# Altium PCB Smart_Lock.PcbDoc
Units mil, origin at the board's own origin, x right, y up, seen from the top; angles counter-clockwise.
Board outline 3325 x 2655 mil, 2 copper layers (Top Layer, Bottom Layer); 78 components, 72 nets, 291 pads, 51 vias.
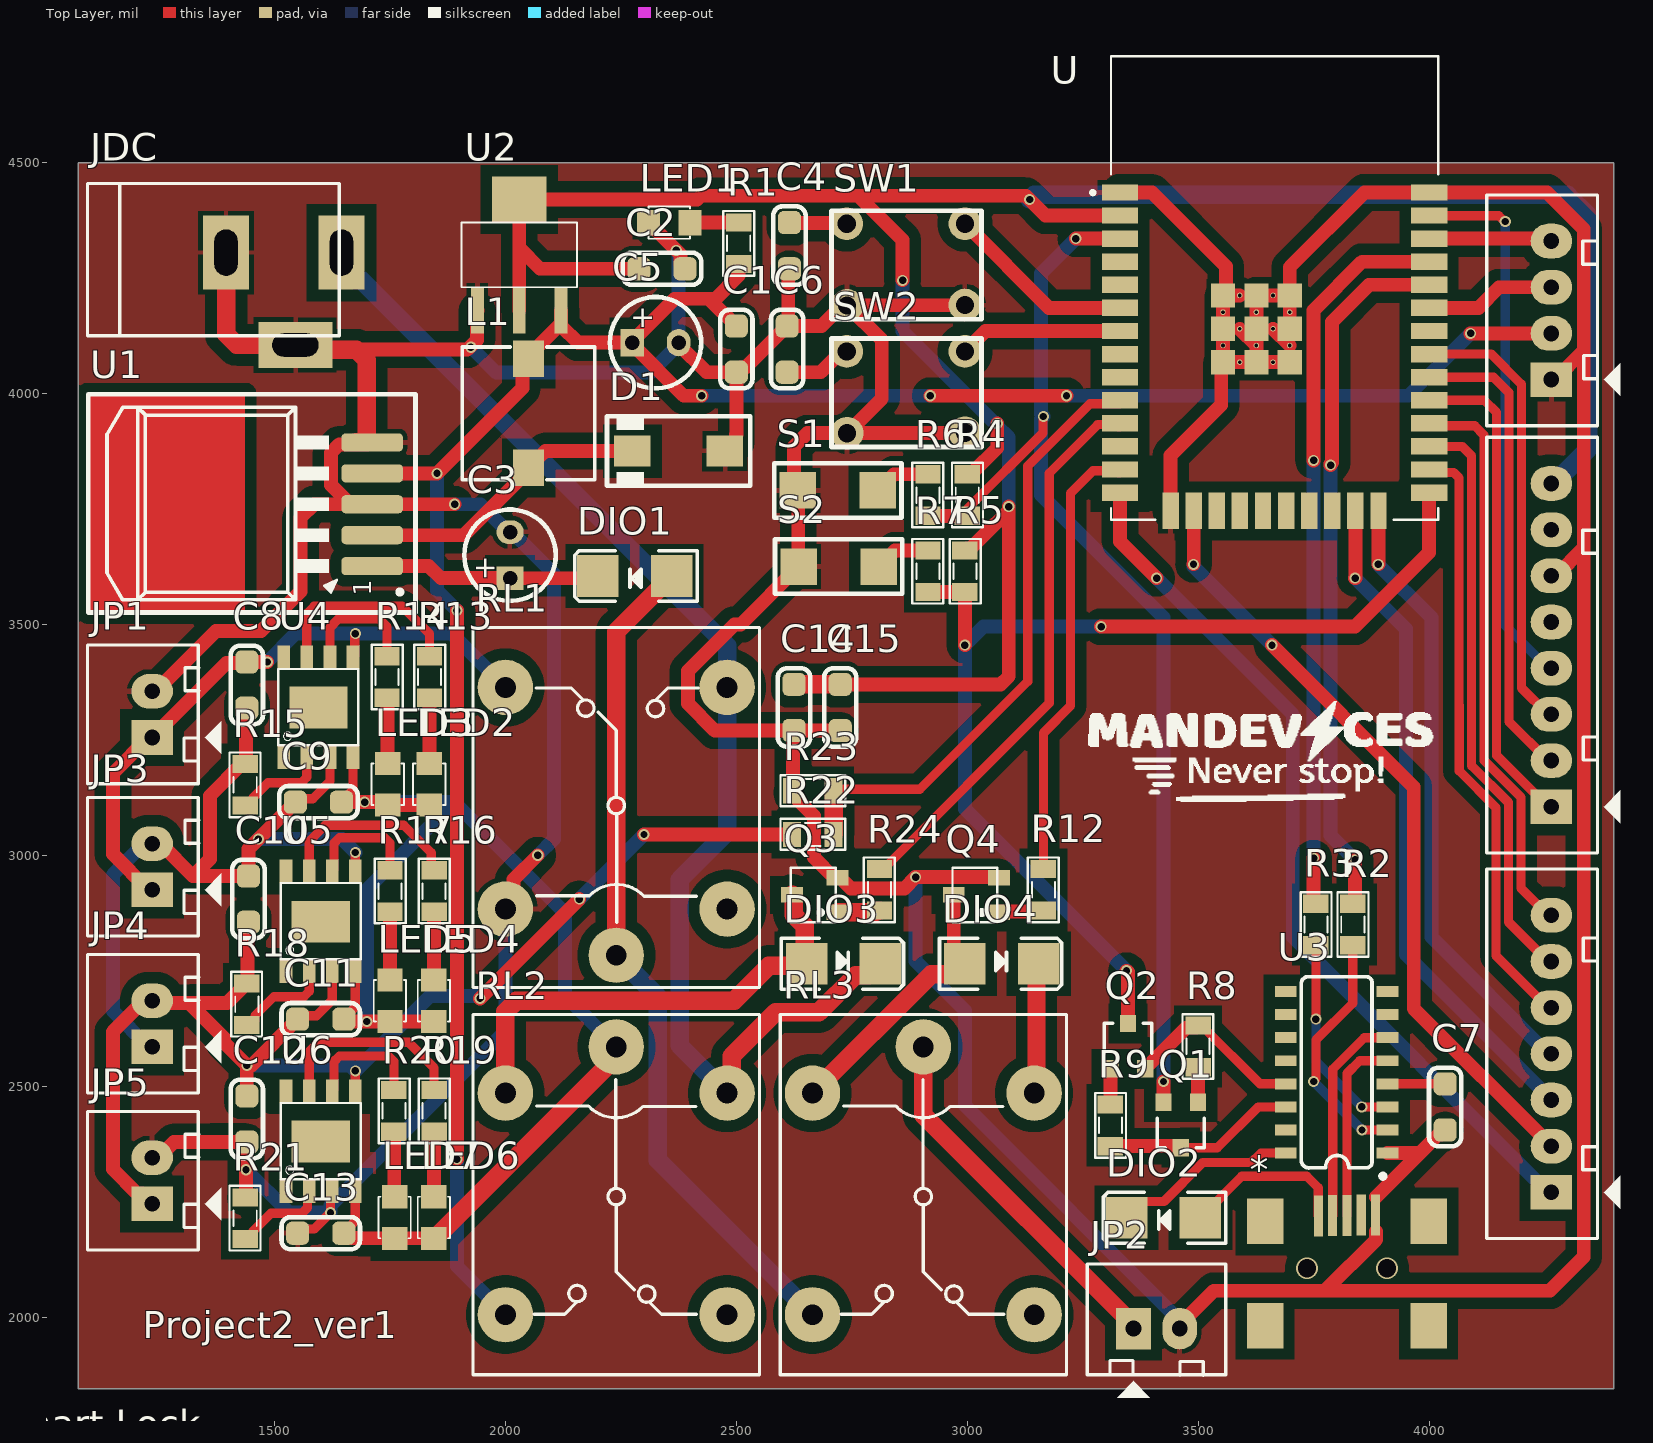
[diagram p0: Top Layer view]
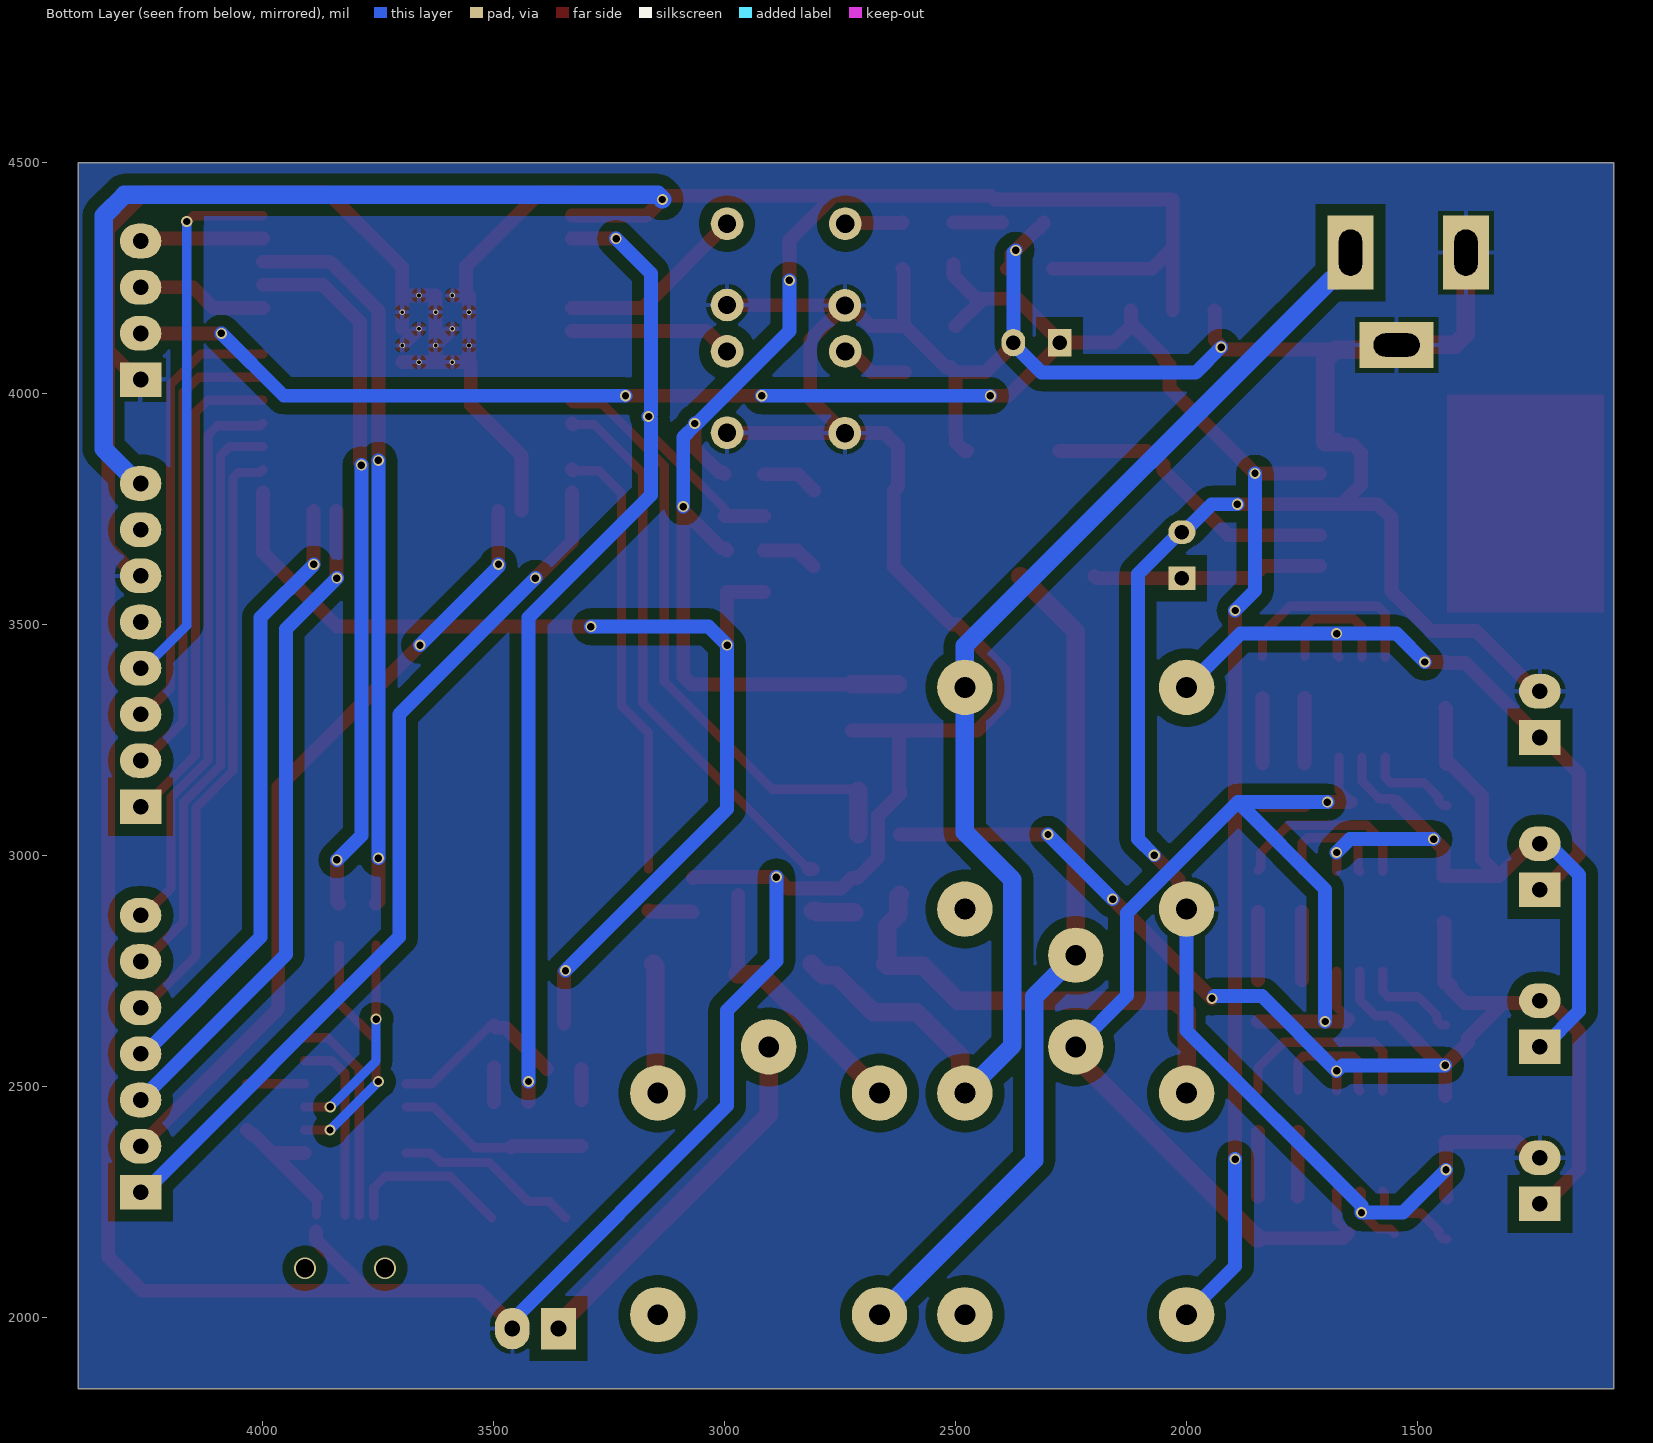
[diagram p1: Bottom Layer view, seen from below]
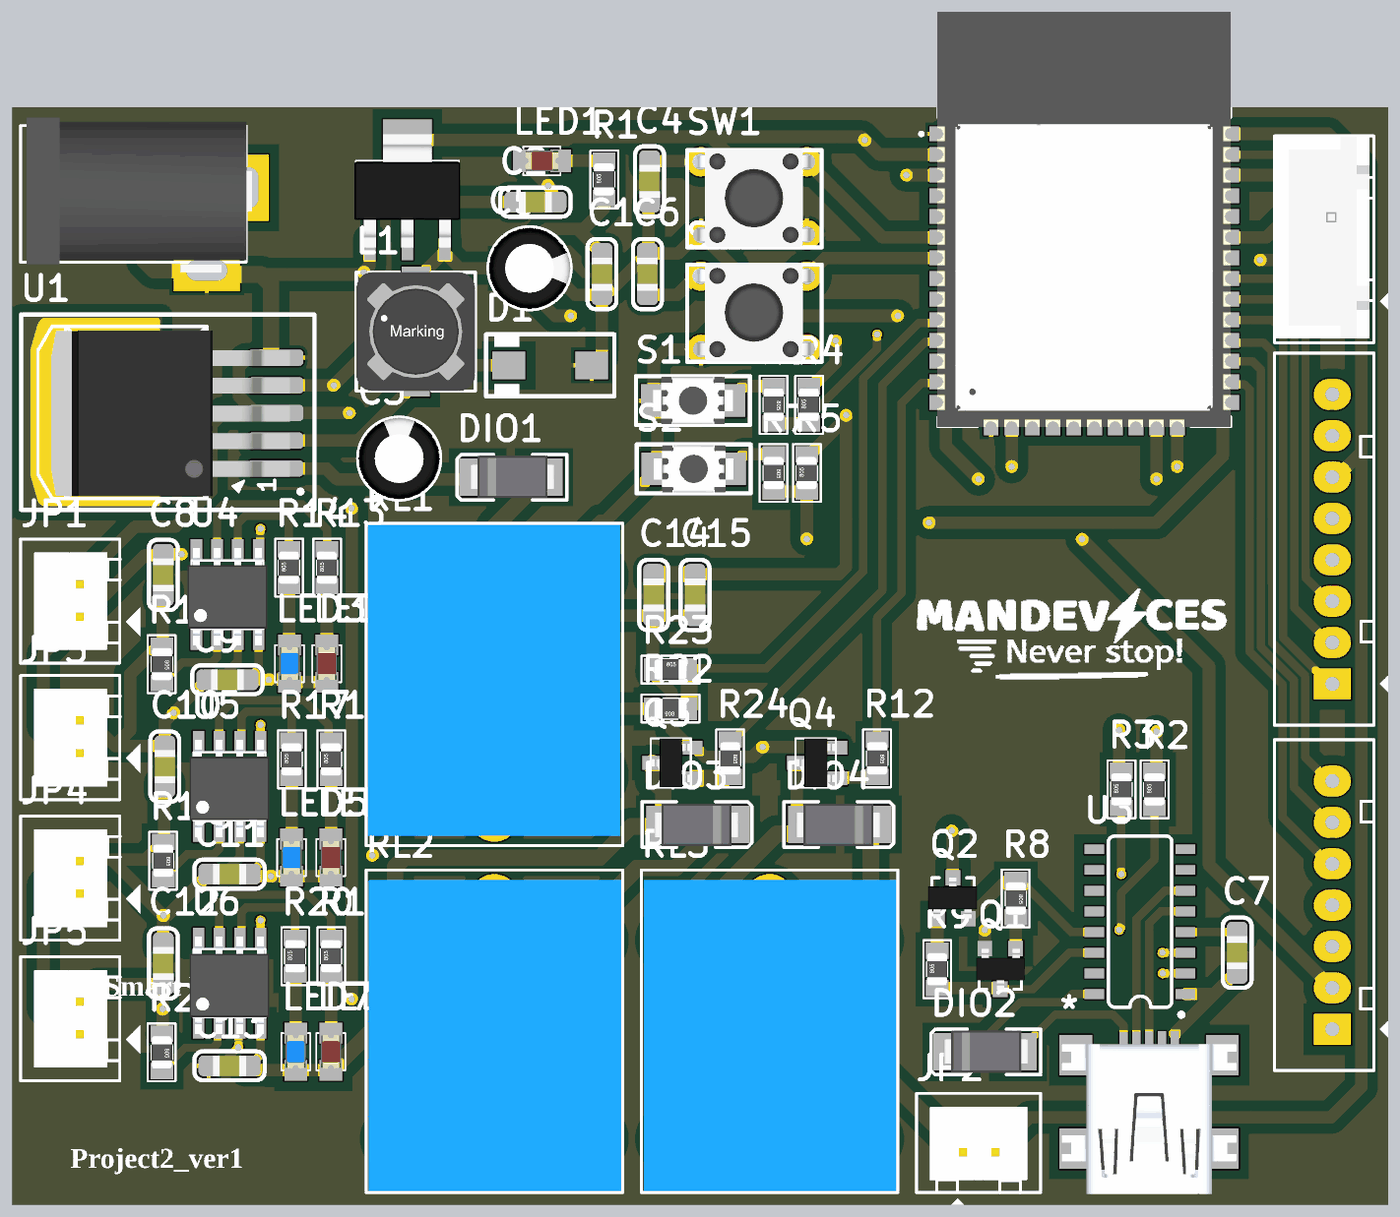
[diagram p2: 3D render of the assembled board from above, using the file's embedded part models]

## Layer stack, top to bottom
Top Solder: solder mask 0.4, Solder Resist, Dk 3.5
Top Layer: signal copper 1.4
Dielectric 1: dielectric 12.6, FR-4, Dk 4.8
Bottom Layer: signal copper 1.4
Bottom Solder: solder mask 0.4, Solder Resist, Dk 3.5

## Board outline
1075,1845 4400,1845 4400,4500 1075,4500

## Design rules (kind name [scope] priority, off if disabled: settings)
Clearance [All] p1: gap=25 ignorepadtopadclearanceinfootprint=FALSE except(0: Arc-Text Arc-Hole Track-Text Track-Hole SMDPad-Text SMDPad-Hole THPad-Text THPad-Hole Via-Text Via-Hole Fill-Text Fill-Hole Poly-Text Poly-Hole Region-Text Region-Hole Text-Text Text-Hole; 7: Arc-Arc Arc-Track Arc-SMDPad Track-Track Track-SMDPad SMDPad-SMDPad; 10: Arc-THPad Arc-Via Track-THPad Track-Via SMDPad-THPad SMDPad-Via THPad-THPad THPad-Via Via-Via)
PolygonConnect [All] p1: connectstyle=Relief reliefconductorwidth=10 reliefentries=4 polygonreliefangle="90 Angle" airgapwidth=10
RoutingVias [All] p1: holewidth=28 width=50 viastyle="Through Hole" minholewidth=28 minwidth=50 maxholewidth=28 maxwidth=50
SolderMaskExpansion [All] p1: expansion=4 istentingtop=FALSE
Width [All] p1: maxlimit=40 minlimit=20 preferedwidth=30
30 further rules are at their usual default settings.

## Classes and differential pairs
component class Smart_Lock: * C1 C2 C3 C4 C5 C6 C7 C8 C9 C10 C11 C12 C13 C14 C15 D1 DIO1 DIO2 DIO3 DIO4 JDC JP1 JP2 JP3 JP4 JP5 L1 LED1 LED2 LED3 LED4 LED5 LED6 LED7 Q1 Q2 Q3 Q4 R1 R2 R3 R4 R5 R6 R7 R8 R9 R12 R13 R14 R15 R16 R17 R18 R19 R20 R21 R22 R23 R24 RL1 RL2 RL3 S1 S2 SW1 SW2

## Components (designator, comment, footprint, x,y, rotation, side; value= is the part's Value field where it differs from the comment)
* "USB-M" USB-B-Mini 3822.33,2207.2 r180 top
C1 "104" CAP_0805 2500,4096 r90 top value=33p
C2 "104" CAP_0805 2339,4270 r180 top value=33p
C3 "680uF" C5mm 2010,3649.78 r90 top
C4 "100nF" CAP_0805 2615,4320 r90 top value=33p
C5 "220uF" C5mm 2325,4110 r0 top
C6 "100nF" CAP_0805 2610,4096 r270 top value=33p
C7 "Capacitor Ceramic" CAP_0805 4035,2455 r90 top value=33p
C8 "10uF" CAP_0805 1440,3368.5 r90 top value=33p
C9 "10uF" CAP_0805 1595,3115 r0 top value=33p
C10 "10uF" CAP_0805 1443.5,2905 r90 top value=33p
C11 "10uF" CAP_0805 1600,2645 r0 top value=33p
C12 "10uF" CAP_0805 1440,2428.86 r90 top value=33p
C13 "10uF" CAP_0805 1600,2181.5 r0 top value=33p
C14 "100nF" CAP_0805 2625,3320 r270 top value=33p
C15 "10uF" CAP_0805 2725,3320 r270 top value=33p
D1 "Diode Zener" SMA 2375,3875.33 r180 top
DIO1 "Diode SMD" DIO-SMD-106 2280,3604.72 r0 top value=1N5007
DIO2 "Diode SMD" DIO-SMD-106 3425,2215 r0 top value=1N5007
DIO3 "Diode SMD" DIO-SMD-106 2732.1,2765 r180 top value=1N5007
DIO4 "Diode SMD" DIO-SMD-106 3075,2765 r180 top value=1N5007
JDC "Jac DC" DC-IN 1520,4204.88 r0 top
JP1 "JP2" CON2 1235,3255 r90 top value="Connector 2"
JP2 "JP2" CON2 3360,1975 r0 top value="Connector 2"
JP3 "JP2" CON2 1235,2925 r90 top value="Connector 2"
JP4 "JP2" CON2 1235,2585 r90 top value="Connector 2"
JP5 "JP2" CON2 1235,2245 r90 top value="Connector 2"
L1 "33uH" L-SMD-M-7.3x4.5 2050,3956.89 r180 top value="150 mH"
LED1 "LED" LED-0805-Red 2400,4370 r180 top value="LED 3 - 5 ly 2 Colour"
LED2 "LED" LED-0805-Red 1835,3109 r90 top value="LED 3 ly Single Colour"
LED3 "LED" LED-0805-Blue 1745,3109 r90 top value="LED 3 ly Single Colour"
LED4 "LED" LED-0805-Red 1845,2640 r90 top value="LED 3 ly Single Colour"
LED5 "LED" LED-0805-Blue 1750,2640 r90 top value="LED 3 ly Single Colour"
LED6 "LED" LED-0805-Red 1845,2170.5 r90 top value="LED 3 ly Single Colour"
LED7 "LED" LED-0805-Blue 1760,2170.5 r90 top value="LED 3 ly Single Colour"
Q1 "2N222" SOT23-231 3462.4,2415.79 r180 top value=C1815
Q2 "2N222" SOT23-231 3348.16,2586.59 r0 top value=C1815
Q3 "2N222" SOT23D 2670,2914 r90 top value=C1815
Q4 "2N222" SOT23D 3020,2914 r90 top value=C1815
R1 "R0.4W" RES-SMD-0805 2505,4325 r90 top value=1k
R2 "470" RES-SMD-0805 3835,2850 r90 top
R3 "470" RES-SMD-0805 3755,2850 r90 top
R4 "R0.4W" RES-SMD-0805 3000,3780 r90 top value=12k
R5 "R0.4W" RES-SMD-0805 2995,3615 r90 top value=12k
R6 "R0.4W" RES-SMD-0805 2915,3780 r270 top value=470
R7 "R0.4W" RES-SMD-0805 2915,3615 r270 top value=470
R8 "R0.4W" RES-SMD-0805 3500,2586 r270 top value=12k
R9 "R0.4W" RES-SMD-0805 3310,2415 r90 top value=12k
R12 "1k" RES-SMD-0805 3165,2925 r270 top
R13 "1k" RES-SMD-0805 1835.5,3386 r90 top
R14 "1k" RES-SMD-0805 1743.5,3386 r90 top
R15 "1.2k" RES-SMD-0805 1436.5,3152.5 r270 top
R16 "1k" RES-SMD-0805 1845.5,2922.5 r90 top
R17 "1k" RES-SMD-0805 1750,2922.5 r90 top
R18 "1.2k" RES-SMD-0805 1440,2677.5 r270 top
R19 "1k" RES-SMD-0805 1845.5,2446.36 r90 top
R20 "1k" RES-SMD-0805 1758.5,2446.36 r90 top
R21 "1.2k" RES-SMD-0805 1436.5,2214 r270 top
R22 "1k" RES-SMD-0805 2665.66,3045 r180 top
R23 "1k" RES-SMD-0805 2665.66,3140 r0 top
R24 "1k" RES-SMD-0805 2810,2925 r270 top
RL1 "Relay 10A/12V" "RELAY 5" 2240,3108.41 r90 top value="Relay SPDT, 10A, 12V"
RL2 "Relay 10A/12V" "RELAY 5" 2240,2260 r270 top value="Relay SPDT, 10A, 12V"
RL3 "Relay 10A/5V" "RELAY 5" 2905,2260 r270 top value="Relay SPDT, 10A, 12V"
S1 "SW-SMD" "SW 3x2x4" 2720,3790 r180 top
S2 "SW-SMD" "SW 3x2x4" 2721.61,3625 r180 top
SW1 "SW-4P-S" SW-4P-S 2995,4191.57 r180 top
SW2 "SW-4P-S" SW-4P-S 2995,3915 r180 top
U "ESP32-WROOM-32" MODULE_ESP32-WROOM-32 3665.49,4228.19 r0 top
U1 "LM2976" TO263 1476.42,3745 r90 top
U2 "LM1117-ADJ" LM1117-SOP 2030,4230 r0 top
U3 "CH340C" SO016 3800,2530 r90 top
U4 "TP4056" TP4056 1595,3320.64 r90 top
U5 "TP4056" TP4056 1600,2857.14 r90 top
U6 "TP4056" TP4056 1600,2381 r90 top
? "I2C" CON4 4265,4030 r90 top value="Connector 4"
? "Keypad" Header7 4265,2270 r90 top value="Connector 7"
? "RFID" CON8 4265,3105 r90 top value="Connector 8"

## Footprints (in the part's own frame and the unit in brackets; to place one, negate y for a bottom-side part, rotate by r counter-clockwise, add the part's x,y. Pads: shape width x height; smd on the part's side, far side on the other; paste and mask are expansions set on the pad)
C5mm [mm]
  rect 1.3x1.5 hole 0.8: 1(-1.27,0)
  oval 1.3x1.5 hole 0.8: 2(1.27,0)
  silkscreen extent -2.51,-2.51 2.51,2.51, body extent -2.5,-2.5 2.49,2.5, height 11.01
CAP_0805 [mil]
  rrect50% 50x50 smd: 1(-50,0) 2(50,0)
  silkscreen extent -85,-35 85,35, body extent -40,-25 40,25, height 24
CON2 [mil] "CON2"
  rect 75x90 hole 34: 1(0,0)
  oval 75x90 hole 34: 2(100,0)
  silkscreen extent -100,-150 200,140, body extent -68,-70 168,107, height 236
CON4 [mil] "CON4"
  rect 75x90 hole 34: 1(0,0)
  oval 75x90 hole 34: 2(100,0) 3(200,0) 4(300,0)
  silkscreen extent -100,-150 400,140, body extent -90,-90 398,136, height 276
CON8 [mil] "CON8"
  rect 75x90 hole 34: 1(0,0)
  oval 75x90 hole 34: 2(100,0) 3(200,0) 4(300,0) 5(400,0) 6(500,0) 7(600,0) 8(700,0)
  silkscreen extent -100,-150 800,140
DC-IN [mil] "Jac DC input"
  rect 100x160 hole 50 slot 100 at 90 deg: 1(125,100) 2(-125,100)
  rect 160x100 hole 50 slot 100 at 0 deg: 3(25,-100)
  silkscreen extent -425,-80 120,250, body extent -410,-105 134,269, height 434
DIO-SMD-106 [mil]
  rect 90x90.55 smd: 1(80,0) 2(-80,0)
  silkscreen extent -130,-55 135,55, body extent -99,-50 106,52, height 95
Header7 [mil] "CON7"
  rect 75x90 hole 34: 1(0,0)
  oval 75x90 hole 34: 2(100,0) 3(200,0) 4(300,0) 5(400,0) 6(500,0) 7(600,0)
  silkscreen extent -100,-150 700,140
L-SMD-M-7.3x4.5 [mm] "WE-PDA SMD Shielded Power Inductor, 7345"
  rect 1.7x2 smd: 1(0,3) 2(0,-3)
  silkscreen extent -3.65,-3.65 3.65,3.65, body extent -3.65,-3.65 3.65,3.65, height 4.05
LED-0805-Blue [mil]
  rect 50x55 smd: 1(0,0) 2(90,0)
  silkscreen extent 0,-35 90,35, body extent 5,-25 85,25, height 43
LED-0805-Red [mil]
  rect 50x55 smd: 1(0,0) 2(90,0)
  silkscreen extent 0,-35 90,35, body extent 5,-25 85,25, height 43
LM1117-SOP [mm]
  rect 0.7x2.54 smd: 1(-2.3,-1.27) 2(0,-1.27) 3(2.3,-1.27)
  rect 3x2.54 smd: 2(0,4.826)
  silkscreen extent -3.17,0 3.17,3.56, body extent -3.25,-1.78 3.25,5.18, height 1.68
MODULE_ESP32-WROOM-32 [mm]
  rect 2x0.9 smd: 1(-8.5,5.26) 2(-8.5,3.99) 3(-8.5,2.72) 4(-8.5,1.45) 5(-8.5,0.18) 6(-8.5,-1.09) 7(-8.5,-2.36) 8(-8.5,-3.63) 9(-8.5,-4.9) 10(-8.5,-6.17) 11(-8.5,-7.44) 12(-8.5,-8.71) 13(-8.5,-9.98) 14(-8.5,-11.25) 25(8.5,-11.25) 26(8.5,-9.98) 27(8.5,-8.71) 28(8.5,-7.44) 29(8.5,-6.17) 30(8.5,-4.9) 31(8.5,-3.63) 32(8.5,-2.36) 33(8.5,-1.09) 34(8.5,0.18) 35(8.5,1.45) 36(8.5,2.72) 37(8.5,3.99) 38(8.5,5.26)
  rect 0.9x2 smd: 15(-5.715,-12.25) 16(-4.445,-12.25) 17(-3.175,-12.25) 18(-1.905,-12.25) 19(-0.635,-12.25) 20(0.635,-12.25) 21(1.905,-12.25) 22(3.175,-12.25) 23(4.445,-12.25) 24(5.715,-12.25)
  rect 1.33x1.33 smd: 39_1(-2.835,-0.405) 39_2(-1,-0.405) 39_3(0.835,-0.405) 39_4(-2.835,-2.24) 39_5(-1,-2.24) 39_6(0.835,-2.24) 39_7(-2.835,-4.075) 39_8(-1,-4.075) 39_9(0.835,-4.075)
  round 0.3 hole 0.2: 39_10(-1.917,-0.405) 39_11(-0.082,-0.405) 39_12(-2.835,-1.322) 39_13(-1,-1.322) 39_14(0.835,-1.322) 39_15(-1.917,-2.24) 39_16(-0.082,-2.24) 39_17(-2.835,-3.157) 39_18(-1,-3.157) 39_19(0.835,-3.157) 39_20(-1.917,-4.075) 39_21(-0.082,-4.075)
  silkscreen extent -10.1,-12.75 9,12.75, body extent -9.02,-12.75 8.98,12.75, height 3.2
"RELAY 5" [mil] "Reley DPDT, 8 pin, 1A, W400mil, L800mil,H 300mil"
  round 120 hole 45: 1(-325,0) 2(255,240) 3(255,-240) 4(-225,-240) 5(-225,240)
  silkscreen extent -395,-310 385,310, body extent -371,-304 381,306, height 602
RES-SMD-0805 [mil]
  rect 39.37x55 smd: 1(-45,0) 2(45,0)
  silkscreen extent -70,-34 70,33, body extent -39,-25 39,25, height 31
SMA [mm]
  rect 2x1.7 smd: 1(-2.544,0) 2(2.544,0)
  silkscreen extent -3.94,-1.9 3.94,1.9, body extent -2.87,-1.4 2.87,1.4, height 2.29
SO016 [mm]
  rect 0.6x1.2 smd: 1(-4.445,-2.8) 2(-3.175,-2.8) 3(-1.905,-2.8) 4(-0.635,-2.8) 5(0.635,-2.8) 6(1.905,-2.8) 7(3.175,-2.8) 8(4.445,-2.8) 9(4.445,2.8) 10(3.175,2.8) 11(1.905,2.8) 12(0.635,2.8) 13(-0.635,2.8) 14(-1.905,2.8) 15(-3.175,2.8) 16(-4.445,2.8)
  silkscreen extent -5.84,-2.67 5.26,1.95
SOT23-231 [mm]
  rect 0.9x0.95 smd mask+0: 1(0.95,-1.25)
  rect 0.9x0.95 smd: 2(-0.95,-1.25) 3(0,1.25)
  silkscreen extent -1.3,-0.38 1.3,1.25, body extent -1.52,-1.23 1.48,1.27, height 1.06
SOT23D [mm] "SOT 23C - 1-3-2 - BCE"
  rect 0.85x1.2 smd: 1(-0.95,-1.25) 2(0.94,-1.245) 3(0,1.25)
  silkscreen extent -1.5,-1.14 1.5,1.32, body extent -1.5,-1.17 1.5,1.33, height 1.06
"SW 3x2x4" [mm]
  rect 2x2 smd: 1(-2.2,0) 2(2.2,0)
  silkscreen extent -3.5,-1.5 3.5,1.5, body extent -2.45,-1.45 2.45,1.45, height 2
SW-4P-S [mm]
  round 1.8 hole 1: 1(0,0) 2(0,-4.47) 3(6.502,-4.47) 4(6.477,0.025)
  silkscreen extent -0.91,-5.18 7.34,0.79, body extent -0.86,-5.23 7.35,0.76, height 9.52
TO263 [mm]
  rrect50% 1x3.4 smd: 1(-3.019,-5.969) 2(-1.319,-5.969) 4(2.081,-5.969) 5(3.781,-5.969)
  rrect50% 1x3.4 smd mask+0: 3(0.381,-5.969)
  Top Layer region: -5.568,1.016 6.432,1.016 6.432,9.65 -5.568,9.65
  silkscreen extent -5.57,-8.35 6.43,9.65, body extent -4.73,-6.84 5.43,7.8, height 4.57
TP4056 [mm]
  rect 1.3x0.7 smd: 1(-2.75,1.905) 2(-2.75,0.635) 3(-2.75,-0.635) 4(-2.75,-1.905) 5(2.75,-1.905) 6(2.75,-0.635) 7(2.75,0.635) 8(2.75,1.905)
  rect 2.3x3.2 smd: GND(-0.025,0)
  silkscreen extent -2.1,-2.2 2.1,2.2, body extent -3.13,-2.45 2.87,2.45, height 1.75
USB-B-Mini [mm]
  rect 2x2.5 smd: 0(-4.5,0) 0(-4.496,5.74) 0(4.5,0) 0(4.504,5.74)
  rect 0.5x2.25 smd: 1(1.575,-0.305) 2(0.787,-0.317) 3(0,-0.33) 4(-0.787,-0.343) 5(-1.575,-0.356)
  body extent -5.35,-0.67 5.35,8.53, height 3.95

## Part data
C1 C2 C4 C6 C7 C8 C9 C10 C11 C12 C13 C14 C15: library part CapSMD, "Capacitor", LatestRevisionDate=17-Jul-2002, LatestRevisionNote="Re-released for DXP Platform.", PackageReference=RAD-0.3, Published=8-Jun-2000, Publisher="Altium Limited"
C3 C5: library part "Cap Pol 5mm", "Polarized Capacitor (Axial)", LatestRevisionDate=17-Jul-2002, LatestRevisionNote="Re-released for DXP Platform.", PackageReference=POLAR0.8, Published=8-Jun-2000, Publisher="Altium Limited"
D1: "Zener Diode", LatestRevisionDate=17-Jul-2002, LatestRevisionNote="Re-released for DXP Platform.", PackageReference=DIODE-0.7, Published=8-Jun-2000, Publisher="Altium Limited"
DIO1 DIO2 DIO3 DIO4: "Default Diode", Code - JEDEC=DO-214-AB, Published=8-Jun-2000, Publisher="Altium Limited", Revision="July-2002: Re-released for DXP Platform."
JDC: library part DCIN, "Jac DC input"
JP1 JP2 JP3 JP4 JP5: library part Con2, "Connector 2"
L1: library part L1, "Inductor"
LED1: library part "LED SMD"
LED2 LED3 LED4 LED5 LED6 LED7: "LED Single colour Green and Red"
Q1 Q2 Q3 Q4: "NPN 600mW, ECB"
R1 R4 R5 R6 R7 R8 R9: library part "Res 1/4 W", "Resistor", LatestRevisionDate=17-Jul-2002, LatestRevisionNote="Re-released for DXP Platform.", PackageReference=AXIAL-0.4, Published=8-Jun-2000, Publisher="Altium Limited"
R2 R3 R12 R13 R14 R15 R16 R17 R18 R19 R20 R21 R22 R23 R24: library part "Resistor - SMD", "Resistor", Manufacturer="Generic Components", Class=Passive, Published=08/06/2000, Publisher="Altium Hobart Technology Centre"
RL1 RL2 RL3: library part "Relay 5", "Relay SPDT,10A - 12VDC 5 Pin"
S1 S2: "Switch", LatestRevisionDate=17-Jul-2002, LatestRevisionNote="Re-released for DXP Platform.", PackageReference=SPST-2, Published=24-Mar-1999, Publisher="Altium Limited"
SW1 SW2: library part SW-4PIN-SMALL, "Switch Small 4 Pin", LatestRevisionDate=17-Jul-2002, LatestRevisionNote="Re-released for DXP Platform.", PackageReference=SPST-2, Published=24-Mar-1999, Publisher="Altium Limited"
U: "Bluetooth, WiFi Transceiver Module 2.4GHz ~ 2.5GHz Surface Mount", Package="Module Espressif Systems", Digi-Key_Part_Number=1904-1010-1-ND, Digi-Key_Purchase_URL=https://www.digikey.com/product-detail/en/espressif-systems/ESP32-WROOM-32/1904-1010-1-ND/8544305?utm_source=snapeda&utm_medium=aggregator&utm_campaign=symbol, MF="Espressif Systems", MP=ESP32-WROOM-32, SnapEDA_Link=https://www.snapeda.com/parts/ESP32-WROOM-32/Espressif%20Systems/view-part/2753322/?ref=snap
U1: library part LM2596, Max Input Voltage="12 V", Max Output Current="3 (6.0 peak) A", Max Output Voltage=mV, Temperature Range="-40 to +125 degC", Category=IC-Power, Min Input Voltage=mV, Min Output Voltage=mV, Mounting Technology="Surface Mount", Status=Unreleased, Supply Voltage=mV
U2: "800mA Low-Dropout Linear Regulator", Creator="Nguyen Ba Bien", Website=http://group3i.net
U3: "USB to serial chip CH340", Package=Package, Availability=Unavailable, Check_prices=https://www.snapeda.com/parts/CH340C/WCH/view-part/5428851/?ref=eda, MF=WCH, MP=CH340C, Price=None, SnapEDA_Link=https://www.snapeda.com/parts/CH340C/WCH/view-part/5428851/?ref=snap
U4 U5 U6: "Complete single cell Li-Ion battery with a constant current / constant voltage linear charger"
?: library part Con4, "Connector 4"
?: library part Header7, "Connector 7"
?: library part Con8, "Connector 8"

## Via types
v1: diameter 24, hole 16, Top Layer to Bottom Layer, 49 vias
v2: diameter 47.24, hole 39.37, Top Layer to Bottom Layer, 2 vias

## Nets (pads, with @x,y where several pads share a name; then routed paths per layer and width w, separated by ;. In a path a pad name is that pad's centre, name@x,y a point inside that pad or via, vN(x,y) a via of type N, cw(c..) or ccw(c..) an arc to the next point about the centre after c; other vN are vias at no path point)
3V3: ?.8 C2.2 C14.1 C15.1 R4.2 R5.2 U2.2 U.2 | length 5619.4
  Top Layer w30: U2.2@2030,4180 2030,4315 ; C2.2 2075,4270 2030,4315 ; C15.1 3072.43,3370 3090,3387.57 v1(3090,3755) 3090,3746.7 3036.61,3693.31 3036.13,3693.31 3007.5,3664.68 2999.69,3664.68 R5.2 ; v1(2860,4245) 2860,4332.03 2764.03,4428 ; R4.2 3004.69,3829.68 3012.5,3829.68 3065,3882.18 v1(3065,3935) ; U.2 3169.72,4385.28 3127,4428 2764.03,4428 ; 2030,4315 2030,4420 2415.04,4420 2423.04,4428 2764.03,4428
  Top Layer w40: C14.1 C15.1
  Bottom Layer w30: v1(2860,4245) 2860,4135.47 3020.03,3975.43 3060.47,3935 v1(3065,3935) 3065,3930 3090,3905 v1(3090,3755)
  Bottom Layer w40: v1(3135,4420) 3145,4430 4300,4430 4345,4385 4345,3880 4270,3805 ?.8
5V: ?.2@4265,4130 C1.2 C5.1 L1.2 R1.1 RL2.3 U1.4 U2.3 | length 5155.6
  Top Layer w30: U1.4 v1(1851.93,3826.93) 2036.76,4011.76 2036.76,4061.76 L1.2 2050,4080.91 2114.09,4145 2119.33,4145 2120.55,4146.22 U2.3 ; v1(1895,2342) v1(1895,3530) ; U2.3@2121.77,4145 2156.77,4110 C5.1 ; v1(2425,3995) 2386.06,3995 2275,4106.06 C5.1 ; C1.2 2441,4205 ; R1.1 2505,4255 2455,4205 2441,4205 ; v1(2920,3995) v1(3215,3995) ; v1(4090,4130) ?.2@4265,4130 ; C5.1 2275,4113.94 2366.06,4205 2441,4205
  Bottom Layer w30: v1(1851.93,3826.93) 1851.93,3573.07 v1(1895,3530) ; v1(1895,2342) 1895,2110 RL2.3 ; v1(2425,3995) v1(2920,3995) ; v1(3215,3995) 3955,3995 v1(4090,4130)
Access_Point: SW2.2 U.7 | length 354.2
  Top Layer w30: SW2.2 3039.28,4135.28 U.7
BAT_ADC: R22.1 R23.2 U.10 | length 1338.6
  Top Layer w20: R23.2@2713.33,3142.67 2897.42,3142.67 3131.23,3376.48 3131.23,3843.04 3265.74,3977.56 3323.13,3977.56 U.10@3328.13,3982.56
  Top Layer w30: R23.2 R23.2@2713.33,3142.67 ; U.10@3328.13,3982.56 U.10
  Top Layer w40: R22.1 R23.2
BOOT: Q2.3 R5.1 R7.2 U.25 | length 2378.7
  Top Layer w30: R7.2 R5.1 v1(2995,3455) ; v1(3290,3495) 3840,3495 4000.14,3655.14 U.25 ; v1(3345,2750) 3348.16,2746.84 Q2.3
  Bottom Layer w30: v1(3290,3495) 3035,3495 v1(2995,3455) 2995,3100 v1(3345,2750)
COL1: ?.5@4265,2670 U.26 | length 1306.8
  Top Layer w20: U.26 4006.5,3828.91 4053.28,3828.91 4065,3817.19 4065,3325.26 4065.28,3324.99 4065.28,3182.67 4145,3102.95 4145,2782.5 4257.5,2670 ?.5@4265,2670
COL2: ?.7@4265,2870 U.28 | length 1234.1
  Top Layer w20: U.28 4005.41,3930 4098.79,3930 4119,3909.79 4119,3347.63 4119.28,3347.36 4119.28,3205.04 4199,3125.32 4199,2928.5 4257.5,2870 ?.7@4265,2870
COL3: ?.3@4265,2470 U.23 | length 1452.2
  Top Layer w30: v1(3840,3600) 3840.49,3600.49 U.23
  Bottom Layer w30: v1(3840,3600) 3950,3490 3950,2785 ?.3@4265,2470
Control: SW1.2 U.6 | length 411.4
  Top Layer w30: SW1.2 3177.29,4185.28 U.6
DTR: Q2.1 R8.1 U3.13 | length 395.7
  Top Layer w20: R8.1 3507.81,2631 3633.82,2505 U3.13
  Top Layer w30: Q2.1 3385.57,2538.36 3473.52,2626.32 3495.31,2626.32 R8.1
EN: Q1.1 R4.1 R6.2 U.3 | length 2462.7
  Top Layer w20: R4.1@3001.12,3751.12 3164.23,3914.23 3164.23,3949.23 v1(3165,3950)
  Top Layer w30: R6.2 R4.1 ; v1(3235.28,4335.28) U.3 ; Q1.1 v1(3425,2510)
  Bottom Layer w30: v1(3235.28,4335.28) 3160,4260 3160,3955 v1(3165,3950) 3160,3945 3160,3780 3425,3515 v1(3425,2510)
GND: *.5 ?.1@4265,4030 ?.6@4265,3605 C1.1 C2.1 C3.2 C4.1 C5.2 C6.1 C7.1 C12.1 C13.1 C14.2 C15.2 D1.1 JDC.2 JDC.3 JP1.2 JP2.2 JP5.2 LED1.2 Q3.2 Q4.2 R21.1 R23.1 RL1.5 S1.2 S2.2 SW1.1 SW1.4 SW2.1 SW2.4 U1.3 U1.5 U2.1 U3.1 U6.3 U.1 U.15 U.38 U.39_1 U.39_2 U.39_3 U.39_4 U.39_5 U.39_6 U.39_7 U.39_8 U.39_9 U.39_10 U.39_11 U.39_12 U.39_13 U.39_14 U.39_15 U.39_16 U.39_17 U.39_18 U.39_19 U.39_20 U.39_21 | length 16350.5
  Top Layer w20: C13.1 1559.3,2190.8 1585.8,2190.8 v1(1621.22,2226.22) 1621.22,2268.95 U6.3 ; *.5 3884.33,2258.49 *.5@3885.17,2259.33
  Top Layer w30: JP5.2 1248.72,2345 1282.57,2378.86 1359.27,2378.86 C12.1 1438.25,2377.11 v1(1438.25,2318.93) 1438.25,2260.75 R21.1 ; JP1.2 1242.5,3355 1373.28,3485.78 1470.78,3485.78 1556.24,3571.24 1556.24,3731.24 1585,3760 U1.3 v1(1890,3760) ; U1.3@1659.49,3764.69 1622.49,3801.69 1622.49,3871.6 1640.07,3889.17 1671.34,3889.17 U1.5@1676.03,3893.86 ; 1676.57,4095 1917.43,4095 1938.23,4115.8 1938.23,4178.78 U2.1 ; RL1.5 2017.22,2900.63 2017.22,2947.22 v1(2070,3000) ; LED1.2 2310,4367.5 2320,4357.5 2322.5,4357.5 v1(2370,4310) 2379,4301 2379,4280 C2.1 ; C5.2 2375,4106.06 2435.06,4046 C1.1 ; D1.1 2481.06,3875.33 2499.53,3893.8 2499.53,3910.9 2500,3911.37 C1.1 ; C4.1 2612.5,4267.5 2612.5,4148.5 C6.1 ; C15.2 C14.2 ; SW2.1 2994.5,3914.5 SW2.4@2740.5,3914.5 ; SW1.1 2994.5,4191.07 2740.5,4191.07 SW1.4 ; Q4.2 3067.27,2952.73 v1(2888.26,2952.73) 2863.84,2928.31 2748.57,2928.31 2725.89,2951 Q3.2 2712.11,2951 2667.86,2995.25 2667.86,3084.99 2620.66,3132.19 R23.1 2622.83,3142.17 2622.83,3267.83 C14.2 ; U.1 3331.12,4435 3400,4435 3560,4275 3560,4218.37 U.39_1 ; U.15 3440.49,3865.49 3550,3975 3550,4063.88 U.39_7 ; JP2.2 3460,1982.5 3534.51,2057.01 3774.88,2057.01 ; U.39_15 U.39_18 ; U.39_10 U.39_1 ; U.39_16 U.39_19 ; U.39_9 U.39_21 U.39_8 ; U.39_6 U.39_14 U.39_3 ; *.5@3885.17,2185 3885.17,2167.3 3774.88,2057.01 ; *.5@3885.17,2259.33 3885.17,2260.17 3980,2355 ; U3.1 3980,2355 ; C7.1 4025,2395 4020,2395 3980,2355 ; ?.6@4265,3605 4275,3605 4335,3665 ; ?.1@4265,4030 4272.5,4030 4335,4092.5 ; C1.1 2510,4056 2520,4056 C6.1 ; C6.1 2684.37,4146 2728.94,4190.57 SW1.4 ; C14.2 2453.21,3270 2395,3328.21 2395,3398.62 2496,3499.63 2509.63,3499.63 S2.2 2634.19,3625.81 2634.19,3789.19 S1.2 2625,3798.39 2625,3885 2654,3914 SW2.4 SW2.4@2740.5,3914.5 ; SW1.4 2815,4115.57 2815,3989 SW2.4@2740.5,3914.5 ; U.39_7 U.39_20 U.39_8 ; U.39_7 U.39_17 U.39_4 U.39_12 U.39_1 ; U.39_8 U.39_18 ; U.39_18 U.39_5 U.39_13 U.39_2 U.39_11 U.39_3 ; U.39_3 3698.37,4273.37 3860.28,4435.28 U.38 4255.61,4435.28 4335,4355.89 4335,4092.5 ; 3774.88,2057.01 4262.01,2057.01 4335,2130 4335,3665 ; 4335,3665 4335,4092.5
  Top Layer w40: JDC.2 1395,4128.43 1418.43,4105 1544.88,4105 JDC.3 1554.88,4095 1676.57,4095 1700,4071.57 1700,3894.17 1699.69,3893.86 U1.5@1676.03,3893.86
  Bottom Layer w30: v1(1438.25,2318.93) 1530.96,2226.22 v1(1621.22,2226.22) 1621.22,2241.22 2000,2620 RL1.5 ; v1(1890,3760) 1945.84,3760 1999.14,3706.7 2003.08,3706.7 C3.2 2013.94,3699.78 2105,3608.72 2105,3035 v1(2070,3000) ; v1(1925,4100) 1980,4045 2313.94,4045 2368.08,4099.14 2368.08,4103.08 C5.2 2375,4305 v1(2370,4310) ; v1(2888.26,2952.73) 2888.26,2770.81 2995,2664.07 2995,2457.86 3460,1992.86 JP2.2
IRQ: ?.5@4265,3505
Lock: R12.1 U.13 | length 966.5
  Top Layer w20: R12.1 3165,3264.86 3223.68,3323.54 3223.68,3783.68 3272.56,3832.56 U.13@3328.13,3832.56
  Top Layer w30: U.13@3328.13,3832.56 U.13
MISO: ?.4@4265,3405 U.37 | length 1183.3
  Top Layer w20: U.37 4000.41,4385 4151.19,4385 4163.92,4372.28 v1(4165,4372.28)
  Bottom Layer w20: v1(4165,4372.28) 4165,3497.5 4257.5,3405 ?.4@4265,3405
MOSI: ?.3@4265,3305 U.31 | length 973.2
  Top Layer w20: U.31 4134.72,4085.28 4200,4020 4200,3381.18 4200.28,3380.91 4200.28,3362.22 4257.5,3305 ?.3@4265,3305
Net*_1: *.1 DIO2.1 | length 363.7
  Top Layer w20: DIO2.1 3505,2215.28 3594.72,2305 3735,2305 3760.17,2279.83 3760.17,2219.36 *.1
NetC3_1: C3.1 DIO1.2 U1.1 | length 501.5
  Top Layer w30: U1.1 1833.86,3626.14 1860,3600 2009.78,3600 C3.1 2195.06,3599.78 DIO1.2
NetC4_2: C4.2 SW1.3 | length 125
  Top Layer w30: C4.2 2616.22,4368.78 2737.78,4368.78 SW1.3
NetC6_2: C6.2 SW2.3 | length 147.6
  Top Layer w30: C6.2 2682.94,4046 2727.94,4091 SW2.3
NetC7_2: C7.2 U3.4 | length 124.8
  Top Layer w20: U3.4 C7.2
NetD1_2: D1.2 L1.1 U1.2 | length 645.8
  Top Layer w30: U1.2 1910.2,3693.07 2050,3832.87 2050,3844.69 2068.46,3863.15 2074.37,3863.15 2086.55,3875.33 D1.2
NetDIO3_1: DIO3.1 Q3.3 RL2.4 | length 1033.7
  Top Layer w40: RL2.4 2000,2661.57 2023.43,2685 2495,2685 2570.53,2760.53 2647.64,2760.53 DIO3.1 2648.16,2768.95 2648.16,2846.84 2624.41,2870.59 2624.41,2910.73 2621.14,2914 Q3.3
NetDIO4_1: DIO4.1 Q4.3 RL3.4 | length 586.3
  Top Layer w30: Q4.3 2970.79,2744.08 DIO4.1@2972.44,2742.44
  Top Layer w40: RL3.4 2922.44,2742.44 DIO4.1@2972.44,2742.44
NetDIO4_2: DIO4.2 RL3.5 | length 284.1
  Top Layer w40: RL3.5 3150,2490 3150,2760 DIO4.2
NetJP2_1: JP2.1 RL3.1 | length 798.5
  Top Layer w40: RL3.1 2905,2437.5 3360,1982.5 JP2.1
NetLED1_1: LED1.1 R1.2 | length 105
  Top Layer w30: LED1.1 R1.2
NetLED2_2: LED2.2 R13.1 | length 142.2
  Top Layer w30: LED2.2 1835.25,3199.25 1835.25,3340.75 R13.1
NetLED3_2: LED3.2 R14.1 | length 142.6
  Top Layer w30: R14.1 1744.25,3340.25 1744.25,3199.75 LED3.2
NetLED4_2: LED4.2 R16.1 | length 147.7
  Top Layer w30: LED4.2 1845.25,2730.25 1845.25,2877.25 R16.1
NetLED5_2: LED5.2 R17.1 | length 147.5
  Top Layer w30: LED5.2 R17.1
NetLED6_2: LED6.2 R19.1 | length 141.1
  Top Layer w30: LED6.2 1845.25,2260.75 1845.25,2401.11 R19.1
NetLED7_2: LED7.2 R20.1 | length 141.5
  Top Layer w30: R20.1 1759.25,2400.61 1759.25,2261.25 LED7.2
NetQ1_2: Q1.2 R8.2 | length 76.1
  Top Layer w30: Q1.2 3499.9,2465.1 3499.9,2540.9 R8.2
NetQ2_2: Q2.2 R9.2 | length 67.7
  Top Layer w30: R9.2@3310,2470 3310.38,2470.38 3310.38,2536.99 Q2.2
NetQ3_1: Q3.1 R24.2 | length 92.2
  Top Layer w40: Q3.1 2799.41,2876.6 2802.81,2880 R24.2
NetQ4_1: Q4.1 R12.2 | length 97.2
  Top Layer w30: Q4.1 3070.92,2878.3 3163.3,2878.3 R12.2
NetR2_1: R2.1 U3.2 | length 533.9
  Top Layer w20: v1(3750,2510) 3750,2511.08 3755,2516.08 3755,2599.75 3835,2679.75 R2.1 ; v1(3855,2405) U3.2
  Bottom Layer w20: v1(3750,2510) v1(3855,2405)
NetR3_1: R3.1 U3.3 | length 447
  Top Layer w20: v1(3755,2645) R3.1 ; v1(3854.33,2455) U3.3
  Bottom Layer w20: v1(3755,2645) 3755,2554.33 v1(3854.33,2455)
NetR6_1: R6.1 S1.1 | length 122.9
  Top Layer w30: S1.1 2841.62,3825 R6.1
NetR7_1: R7.1 S2.1 | length 121.3
  Top Layer w30: S2.1 2843.23,3660 R7.1
NetR13_2: R13.2 U4.7 | length 439.5
  Top Layer w20: U4.7 1570,3523.28 1585.72,3539 1776,3539 1835.5,3479.5 R13.2
NetR14_2: R14.2 U4.6 | length 266.5
  Top Layer w20: U4.6 1620,3493.36 1638.64,3512 1726.13,3512 1743.5,3494.63 R14.2
NetR15_2: R15.2 U4.2 | length 207.1
  Top Layer w20: R15.2 1444.31,3107.5 1454,3117.19 1454,3125 1486,3157 1558.28,3157 1570,3168.72 U4.2
NetR16_2: R16.2 U5.7 | length 408.7
  Top Layer w20: U5.7 1575,3030 1610,3065 1780,3065 1839.53,3005.47 1839.53,2973.47 R16.2
NetR17_2: R17.2 U5.6 | length 252.2
  Top Layer w20: U5.6 1628.78,2969.19 1628.78,3026.28 1640.5,3038 1738.28,3038 1750,3026.28 R17.2
NetR18_2: R18.2 U5.2 | length 214.8
  Top Layer w20: R18.2 1447.81,2632.5 1457.5,2642.19 1457.5,2652.5 1498.57,2693.57 1563.28,2693.57 1575,2705.28 U5.2
NetR19_2: R19.2 U6.7 | length 435.6
  Top Layer w20: U6.7 1575,2575 1595,2595 1790,2595 1845.5,2539.5 R19.2
NetR20_2: R20.2 U6.6 | length 266.9
  Top Layer w20: U6.6 1628.78,2493.05 1628.78,2553.28 1640.5,2565 1746.78,2565 1758.5,2553.28 R20.2
NetR21_2: R21.2 U6.2 | length 204.9
  Top Layer w20: R21.2 1444.31,2169 1454,2178.69 1454,2186.5 1492.5,2225 1559.5,2225 1571.22,2236.72 1571.22,2268.95 U6.2
OUT+: C8.2 JP1.1 JP3.1 RL1.2 U4.5 | length 1369.8
  Top Layer w20: U4.5 1673.78,3432.69 1673.78,3477.7 1675,3478.92 v1(1675,3480)
  Top Layer w30: JP3.1 1227.5,2925 1150,3002.5 1150,3177.5 1227.5,3255 JP1.1 1242.5,3255 1265,3277.5 1265,3285 1396.09,3416.09 C8.2@1437.59,3416.09 ; C8.2 v1(1484.22,3418.5)
  Bottom Layer w30: v1(1484.22,3418.5) 1545.72,3480 1883.41,3480 RL1.2
PIN: R24.1 U.11 | length 1212.3
  Top Layer w20: R24.1@2817.81,2970 3177.4,3329.58 3177.4,3827.4 3282.56,3932.56 U.11@3328.13,3932.56
  Top Layer w30: R24.1 R24.1@2817.81,2970 ; U.11@3328.13,3932.56 U.11
ROW1: ?.6@4265,2770 U.27 | length 1271.4
  Top Layer w20: U.27 4071.79,3885.28 4092,3865.07 4092,3336.45 4092.28,3336.17 4092.28,3193.86 4172,3114.13 4172,2855.5 4257.5,2770 ?.6@4265,2770
ROW2: ?.1@4265,2270 U.14 | length 1906.6
  Top Layer w30: U.14 3330.85,3679.15 v1(3410,3600)
  Bottom Layer w30: v1(3410,3600) 3705,3305 3705,2822.5 4257.5,2270 ?.1@4265,2270
ROW3: ?.2@4265,2370 U.16 | length 1697.1
  Top Layer w30: v1(3490,3630) 3490.49,3630.49 U.16 ; v1(3660,3455) 3966.8,3148.2 3966.8,2668.2 ?.2@4265,2370
  Bottom Layer w30: v1(3490,3630) 3490,3625 v1(3660,3455)
ROW4: ?.4@4265,2570 U.24 | length 1335.8
  Top Layer w30: v1(3890,3630) 3890.49,3630.49 U.24
  Bottom Layer w30: v1(3890,3630) 4005,3515 4005,2822.5 4257.5,2570 ?.4@4265,2570
RST: ?.7@4265,3705
RTS: Q1.3 R9.1 U3.14 | length 418.2
  Top Layer w20: Q1.3 3541.57,2366.57 3630,2455 U3.14
  Top Layer w30: R9.1 3459.68,2370 3462.4,2367.28 Q1.3
RX0: R2.2 U.34 | length 1528.8
  Top Layer w30: v1(3787,3844.84) 3787,3847 3790,3850 3790,4155 3870.28,4235.28 U.34 ; R2.2 3835.31,2895 3840,2899.68 v1(3840,2990)
  Bottom Layer w30: v1(3787,3844.84) 3787,3043 v1(3840,2990)
SCK: ?.2@4265,3205 U.30 | length 1026.1
  Top Layer w20: U.30 4139.72,4035.28 4173,4002 4173,3370 4173.28,3369.72 4173.28,3289.22 4257.5,3205 ?.2@4265,3205
SCL_I2C: ?.4@4265,4330 U.36 | length 267
  Top Layer w30: U.36 4259.72,4335.28 ?.4@4265,4330
SDA_I2C: ?.3@4265,4230 U.33 | length 283.4
  Top Layer w30: U.33 4106.89,4185.28 4151.61,4230 ?.3@4265,4230
Source: DIO1.1 RL1.1 RL3.3 | length 1825.5
  Top Layer w40: RL1.1 2240,3484.44 2360,3604.44 DIO1.1
  Bottom Layer w40: RL1.1 2330,2693.41 2330,2340 RL3.3
SS: ?.1@4265,3105 U.29 | length 1064.4
  Top Layer w20: U.29 4119.72,3985.28 4146,3959 4146,3358.82 4146.28,3358.54 4146.28,3216.22 4257.5,3105 ?.1@4265,3105
TX0: R3.2 U.35 | length 1581
  Top Layer w30: v1(3750,2993.66) 3750,2899.69 3754.69,2895 R3.2 ; v1(3750,3855) 3750,4180 3855.28,4285.28 U.35
  Bottom Layer w30: v1(3750,2993.66) v1(3750,3855)
UD+: *.3 U3.5 | length 406.5
  Top Layer w20: *.3 3822.33,2527.33 3850,2555 U3.5
UD-: *.2 U3.6 | length 464
  Top Layer w20: *.2 3791.33,2536.33 3860,2605 U3.6
VBat1-: C8.1 C9.1 C10.2 JP3.2 JP4.1 R15.1 U4.3 U5.5 | length 1790
  Top Layer w20: C9.1 1552.55,3122.55 1582.55,3122.55 1620,3160 U4.3 ; U5.5 v1(1675,3006)
  Top Layer w30: JP3.2 1252.86,3025 1322.86,2955 ; C8.1 1438.25,3316.75 1438.25,3199.25 R15.1 1428.69,3197.5 1360,3128.82 1360,2992.14 1322.86,2955 ; C9.1 1443.5,3013.5 C10.2 1322.86,2955
  Bottom Layer w30: JP4.1 1227.5,2585 1150,2662.5 1150,2957.86 1217.14,3025 JP3.2 ; v1(1465,3035) 1646,3035 v1(1675,3006)
VBat2-: C10.1 C11.1 C12.2 JP4.2 JP5.1 R18.1 R22.2 U5.3 U6.5 | length 2887.2
  Top Layer w20: C11.1 1557.55,2652.55 1590.83,2652.55 1625,2686.72 U5.3 ; U6.5 v1(1675,2533)
  Top Layer w30: JP5.1 1212.5,2267.5 1202.5,2267.5 1150,2320 1150,2617.86 1217.14,2685 JP4.2 1240,2680 1315,2680 ; C12.2 v1(1440,2545) ; C10.1 1441.75,2853.25 1441.75,2724.25 R18.1 1432.19,2722.5 1427.5,2717.82 1427.5,2710 1397.5,2680 1315,2680 ; C11.1 1450,2545 v1(1440,2545) ; v1(1945,2690) v1(2160,2905) ; v1(2300,3045) R22.2 ; 1315,2680 1390.5,2604.5 1390.5,2594.5 v1(1440,2545)
  Bottom Layer w30: v1(1440,2545) 1663,2545 v1(1675,2533) 1837,2695 v1@1940,2695 ; v1(2160,2905) v1(2300,3045)
VCC_USB: DIO2.2 U3.16 | length 402.9
  Top Layer w20: DIO2.2 3345,2215.28 3380,2250.28 3425.96,2250.28 3510.26,2334.57 3615.72,2334.57 3636.14,2355 U3.16
Vcharge: C9.2 C11.2 C13.2 LED2.1 LED3.1 LED4.1 LED5.1 LED6.1 LED7.1 RL2.1 U4.4 U5.4 U6.4 | length 2914.5
  Top Layer w20: C9.2 1645,3116.35 1670,3141.35 U4.4 ; C13.2 1650,2182.85 1675,2207.85 U6.4 ; C11.2 1650,2646.35 1675,2671.35 U5.4
  Top Layer w30: C9.2 v1(1695,3115) 1739,3115 LED3.1 LED2.1 ; C13.2 1660,2171.5 1686.5,2171.5 1687.5,2170.5 LED7.1 LED6.1 ; C11.2 1655,2640 v1(1700,2640) LED5.1 LED4.1
  Top Layer w40: LED6.1 1847.5,2170.5 2224.69,2547.69 2224.69,2569.69 RL2.1
  Bottom Layer w30: v1(1695,3115) 1888.62,3115 ; v1(1700,2640) 1700,2926.38 1888.62,3115 ; RL2.1 2128.99,2696.01 2128.99,2874.63 1888.62,3115
VIN: DIO3.2 JDC.1 RL1.3 RL2.5 | length 2748.6
  Top Layer w40: RL2.5 2489.85,2494.85 2489.85,2564.85 2585,2660 2678.53,2660 2758.26,2739.72 2787.1,2739.72 2812.1,2764.72 DIO3.2
  Bottom Layer w40: JDC.1 1645,4274.88 1675,4244.88 1689.09,4244.88 2480,3453.98 RL1.3 2480,3050 2377,2947 2377,2588 RL2.5
pads on no net: *.0 *.4 RL1.4 RL2.2 RL3.2 U3.7 U3.8 U3.9 U3.10 U3.11 U3.12 U3.15 U4.1 U4.8 U4.GND U5.1 U5.8 U5.GND U6.1 U6.8 U6.GND U.4 U.5 U.8 U.9 U.12 U.17 U.18 U.19 U.20 U.21 U.22 U.32
copper on no net:
  other v2: 3735.72,2105.63 3908.95,2105.63

## Polygon pours and split planes (outlines as drawn)
GND on Top Layer "NONET_L-01_P-001" (solid, pour order 0): 1075,4500 1075,1845 4400,1845 4400,4500
GND on Bottom Layer "NONET_L-01_P-001" (solid, pour order 1): 1075,4500 1075,1845 4400,1845 4400,4500

## Silkscreen, mask and mechanical layers (free items; w line width, h text height)
Top Overlay:
  drawing of 907 lines, arcs and shapes, not listed
  text "Project2_ver1" at 1215,1934.52 h100
  text "Smart Lock" at 887.12,1721.11 h100

## Text inside footprints (layer, text, board x,y; h text height)
C3: Top Overlay "+" at 1977,3594.78 h47.24 r90
C5: Top Overlay "+" at 2270,4143 h47.24
U: Mechanical 13 "ANTENNA" at 3429.27,4582.52 h70
U1: Top Overlay "1" at 1709.42,3562.14 h39.37 r90